# Altium PCB w32_dmx512-slaver_PCB.PcbDoc
Units mil, origin at the board's own origin, x right, y up, seen from the top; angles counter-clockwise.
Board outline 6010.03 x 1910.03 mil, 2 copper layers (Top Layer, Bottom Layer); 38 components, 36 nets, 155 pads, 18 vias.
Unrouted connection lines stored in the file: 7.
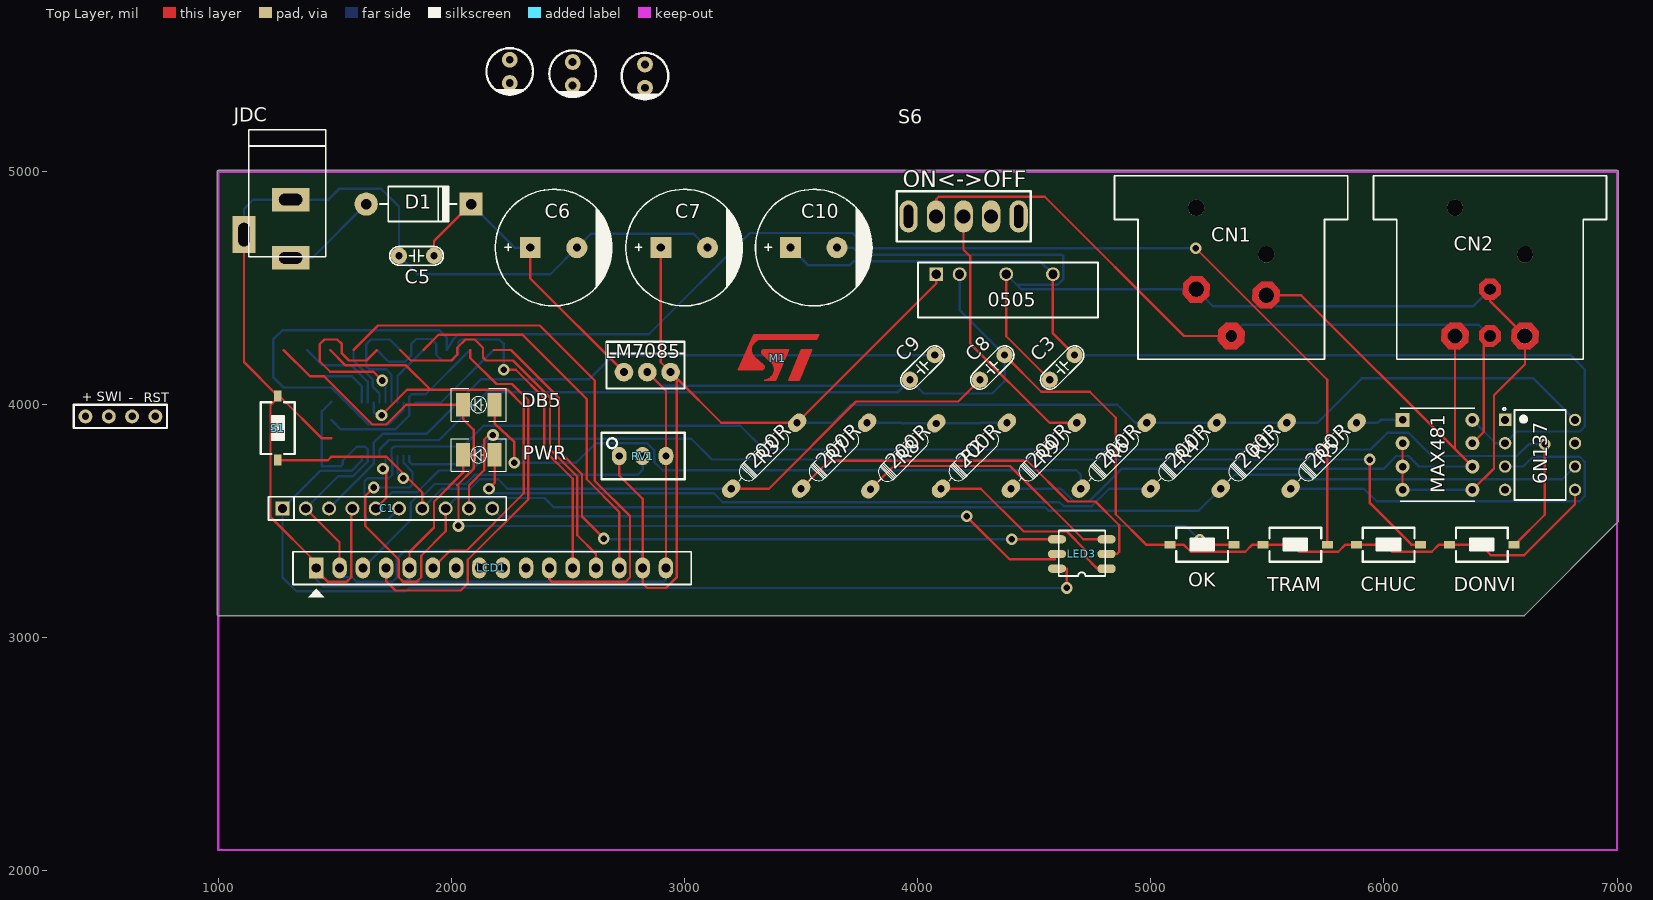
[diagram p0: Top Layer view]
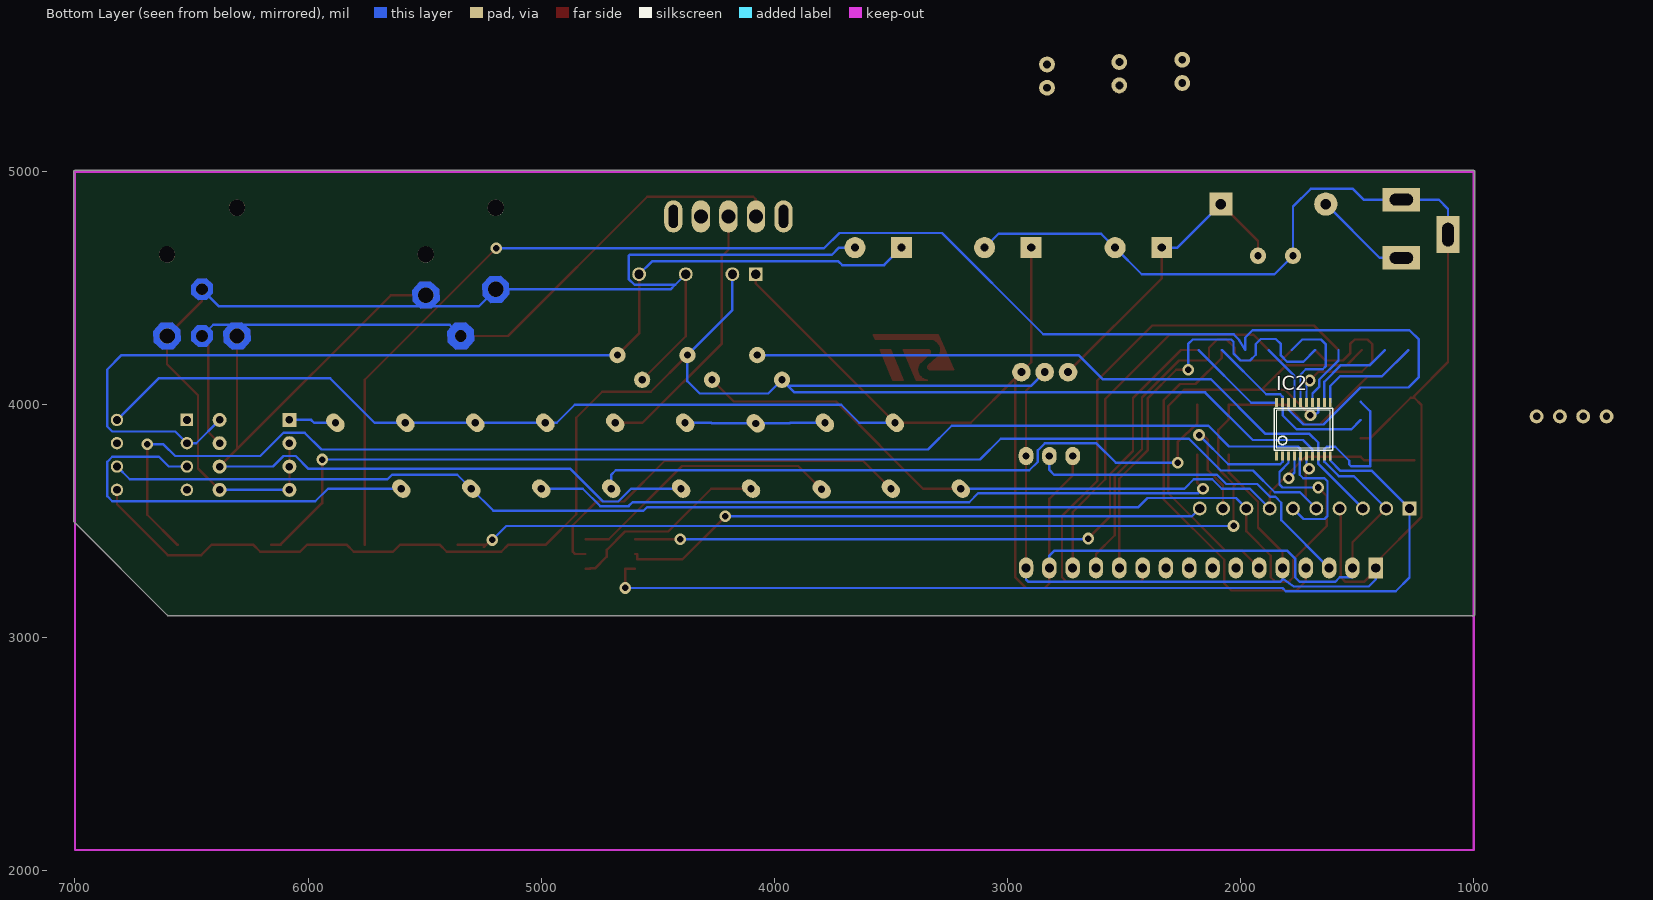
[diagram p1: Bottom Layer view, seen from below]

## Layer stack, top to bottom
Top Solder: solder mask 0.4, Solder Resist, Dk 3.5
Top Layer: signal copper 1.4
Dielectric 1: dielectric 12.6, FR-4, Dk 4.8
Bottom Layer: signal copper 1.4
Bottom Solder: solder mask 0.4, Solder Resist, Dk 3.5

## Board outline
1000,3094.99 cw(c1000,3100) 994.99,3100 994.99,5000 cw(c1000,5000) 1000,5005.02 7000,5005.02 cw(c7000,5000) 7005.02,5000 7005.02,3500 cw(c7000,3500) 7003.53,3496.44 7003.55,3496.45 6603.55,3096.45 6603.56,3096.47 cw(c6600,3100) 6600,3094.99

## Design rules (kind name [scope] priority, off if disabled: settings)
Clearance [All] p1: gap=10 ignorepadtopadclearanceinfootprint=FALSE except(0: Arc-Hole Track-Hole SMDPad-Hole THPad-Hole Via-Hole Fill-Hole Poly-Hole Region-Hole Text-Hole)
PolygonConnect [All] p1: connectstyle=Relief reliefconductorwidth=10 reliefentries=4 polygonreliefangle="90 Angle" airgapwidth=10
RoutingVias [All] p1: holewidth=28 width=50 viastyle="Through Hole" minholewidth=28 minwidth=50 maxholewidth=28 maxwidth=50
SolderMaskExpansion [All] p1: expansion=4
Width [All] p1: maxlimit=10 minlimit=10 preferedwidth=10
30 further rules are at their usual default settings.

## Classes and differential pairs
component class w32_dmx512-slaver_Schematic: 6N137 0505 C3 C5 C6 C7 C8 C9 C10 CHUC CN1 CN2 D1 DB5 DONVI IC2 JDC LED3 LM7085 M1 MAX481 OK PWR R1 R2 R3 R4 R5 R6 R7 R8 R9 RV1 S1 S6 TRAM

## Components (designator, comment, footprint, x,y, rotation, side; value= is the part's Value field where it differs from the comment)
6N137 "6N137" DIP762W50P254L977H451Q8 6670,3785 r0 top
0505 "REE-0505S" SIP600W25P254L1960H1020Q4P 4387.09,4491.89 r0 top
C1 "JP10" JP10-C1T 1275,3555 r0 top
C3 "104" CN150 4620,4160 r45 top
C5 "104" CN150 1850,4639 r0 top
C6 "Cap Pol3" CP2/5 2338,4674 r0 top
C7 "Cap Pol3" CP2/5 2898,4674 r0 top
C8 "104" CN150 4320,4160 r45 top
C9 "104" CN150 4020,4160 r45 top
C10 "Cap Pol3" CP2/5 3454,4674 r0 top
CHUC "SW-SMD" SW-SMD#1 6020,3400 r0 top
CN1 "NC3FBH1" NC3FBH1 5345,4495 r0 top
CN2 "NC3MBH" NC3MBH_NC3MBH(Primary) 6455,4495 r0 top
D1 "1N4007" D2A 2084,4861 r180 top
DB5 "LED" LED-RED-0805 2185,4000 r180 top (schematic designator LED2)
DONVI "SW-SMD" SW-SMD#1 6420,3400 r0 top
IC2 "STM8S003F3P6" TSSOP20 1730,3895 r180 bottom
JDC "Jac DC" DC-IN 1210,4755 r270 top
LCD1 "LCD 16x2A" LCD16X2N 1420,3300 r0 top
LED3 "150141M173100" "LED RGB 5050" 4700,3360 r180 top
LM7085 "LM7805" 7805 2840,4140 r0 top
M1 "STLOGO" STLOGO-SILVER 3400,4200 r0 top
MAX481 "MAX481CPA" 21-0043D_8 6380,3635 r0 top
OK "SW-SMD" SW-SMD#2 5220,3400 r180 top
PWR "LED" LED-RED-0805 2185,3785 r180 top (schematic designator LED1)
R1 "R0.4W" "DIEN TRO 1/4 W" 5300,3640 r45 top
R2 "R0.4W" "DIEN TRO 1/4 W" 4100,3640 r45 top
R3 "R0.4W" "DIEN TRO 1/4 W" 3200,3640 r45 top
R4 "R0.4W" "DIEN TRO 1/4 W" 5000,3640 r45 top
R5 "R0.4W" "DIEN TRO 1/4 W" 5600,3640 r45 top
R6 "R0.4W" "DIEN TRO 1/4 W" 4700,3640 r45 top
R7 "R0.4W" "DIEN TRO 1/4 W" 3500,3640 r45 top
R8 "R0.4W" "DIEN TRO 1/4 W" 3797.16,3637.16 r45 top
R9 "R0.4W" "DIEN TRO 1/4 W" 4400,3640 r45 top
RV1 "RV20K" RVAR10K 2820,3780 r0 top
S1 "SW-SMD" SW-SMD#1 1255,3900 r90 top
S6 "Switch" Switch 3960.67,4808 r0 top
TRAM "SW-SMD" SW-SMD#2 5620,3400 r180 top

## Footprints (in the part's own frame and the unit in brackets; to place one, negate y for a bottom-side part, rotate by r counter-clockwise, add the part's x,y. Pads: shape width x height; smd on the part's side, far side on the other; paste and mask are expansions set on the pad)
21-0043D_8 [mil]
  rect 60x60 hole 32: 1(-300,300)
  round 60 hole 32: 2(-300,200) 3(-300,100) 4(-300,0) 5(0,0) 6(0,100) 7(0,200) 8(0,300)
  silkscreen extent -310,-50 10,350
7805 [mil]
  round 80 hole 34: 1(-100,0) 2(0,0) 3(100,0)
  silkscreen extent -175,-70 160,130
CN150 [mil]
  round 70 hole 31: 1(-75,0) 2(75,0)
  silkscreen extent -115,-40 115,40, body extent -115,-33 115,33, height 235
CP2/5 [mil] "Tu hoa 1000uF/25V,50V"
  rect 90x90 hole 35: 1(0,0)
  round 90 hole 35: 2(200,0)
  silkscreen extent -150,-250 350,250, body extent -142,-246 350,246, height 984
D2A [mil] "Diode 2A, W 150mil, L 450mil"
  round 100 hole 45: 1(450,0)
  rect 100x100 hole 45: 2(0,0)
  silkscreen extent 61,-75 391,75, body extent 5,-47 435,54, height 100
DC-IN [mil] "Jac DC input"
  rect 100x160 hole 50 slot 100 at 90 deg: 1(125,100) 2(-125,100)
  rect 160x100 hole 50 slot 100 at 0 deg: 3(25,-100)
  silkscreen extent -425,-80 120,250, body extent -410,-105 134,269, height 434
"DIEN TRO 1/4 W" [mm]
  oval 2.2x1.6 hole 0.787: 1(0,0) 2(10.16,0)
  silkscreen extent 1.26,-1.02 8.88,1.02, body extent -0.3,-1.16 10.46,1.16, height 2.93
DIP762W50P254L977H451Q8 [mm]
  rect 1.35x1.35 hole 0.85: 1(-3.81,3.81)
  round 1.35 hole 0.85: 2(-3.81,1.27) 3(-3.81,-1.27) 4(-3.81,-3.81) 5(3.81,-3.81) 6(3.81,-1.27) 7(3.81,1.27) 8(3.81,3.81)
  silkscreen extent -4.04,-4.9 2.8,5.14
JP10-C1T [mm] "10 row, straight, gold plating"
  rect 1.52x1.52 hole 1.02: 1(0,0)
  round 1.52 hole 1.02: 2(2.54,0) 3(5.08,0) 4(7.62,0) 5(10.16,0) 6(12.7,0) 7(15.24,0) 8(17.78,0) 9(20.32,0) 10(22.86,0)
  silkscreen extent -1.52,-1.27 24.38,1.27, body extent -1.52,-1.25 24.38,1.25, height 8.51
LCD16X2N [mil] "LCD dipslay 16x2, 16 pin"
  rect 62x90 hole 39: 1(0,0)
  oval 62x90 hole 39: 2(100,0) 3(200,0) 4(300,0) 5(400,0) 6(500,0) 7(600,0) 8(700,0) 9(800,0) 10(900,0) 11(1000,0) 12(1100,0) 13(1200,0) 14(1300,0) 15(1400,0) 16(1500,0)
  silkscreen extent -100,-125 1608,70, body extent -320,-1353 2850,84, height 764
"LED RGB 5050" [mm]
  oct 2x0.9 smd: 1(-2.794,1.6)
  oval 2x0.9 smd: 2(-2.794,0) 3(-2.794,-1.6) 4(2.606,-1.6) 5(2.606,0) 6(2.606,1.6)
  silkscreen extent -2.67,-2.54 2.41,2.4, body extent -2.78,-2.54 2.52,2.46, height 1.6
LED-RED-0805 [mil]
  rect 60x100 smd: 1(0,0) 2(135,0)
  silkscreen extent -50,-70 185,70, body extent -20,-60 154,60, height 75
NC3FBH1 [mil]
  round 66 hole 66: 1(-150,0) 2(150,-25)
  round 50 hole 50: 3(0,-200)
  round 70 hole 70 unplated: None(-150,350) None(150,150)
  Top Layer region: -91.27,21.38 -123.59,56.64 -171.38,58.73 -206.64,26.41 -208.73,-21.38 -176.41,-56.64 -128.62,-58.73 -93.36,-26.41
  Top Layer region: 58.73,-178.62 26.41,-143.36 -21.38,-141.27 -56.64,-173.59 -58.73,-221.38 -26.41,-256.64 21.38,-258.73 56.64,-226.41
  Top Layer region: 208.73,-3.62 176.41,31.64 128.62,33.73 93.36,1.41 91.27,-46.38 123.59,-81.64 171.38,-83.73 206.64,-51.41
  Bottom Layer region: -91.27,21.38 -123.59,56.64 -171.38,58.73 -206.64,26.41 -208.73,-21.38 -176.41,-56.64 -128.62,-58.73 -93.36,-26.41
  Bottom Layer region: 58.73,-178.62 26.41,-143.36 -21.38,-141.27 -56.64,-173.59 -58.73,-221.38 -26.41,-256.64 21.38,-258.73 56.64,-226.41
  Bottom Layer region: 208.73,-3.62 176.41,31.64 128.62,33.73 93.36,1.41 91.27,-46.38 123.59,-81.64 171.38,-83.73 206.64,-51.41
  Multi-Layer region: -91.27,21.38 -123.59,56.64 -171.38,58.73 -206.64,26.41 -208.73,-21.38 -176.41,-56.64 -128.62,-58.73 -93.36,-26.41
  Multi-Layer region: 58.73,-178.62 26.41,-143.36 -21.38,-141.27 -56.64,-173.59 -58.73,-221.38 -26.41,-256.64 21.38,-258.73 56.64,-226.41
  Multi-Layer region: 208.73,-3.62 176.41,31.64 128.62,33.73 93.36,1.41 91.27,-46.38 123.59,-81.64 171.38,-83.73 206.64,-51.41
  silkscreen extent -500,-300 500,488
NC3MBH_NC3MBH(Primary) [mil]
  round 66 hole 66: 1(150,-200) 2(-150,-200)
  round 50 hole 50: 3(0,-200) G(0,0)
  round 70 hole 70 unplated: None(-150,350) None(150,150)
  Top Layer region: 208.73,-178.62 176.41,-143.36 128.62,-141.27 93.36,-173.59 91.27,-221.38 123.59,-256.64 171.38,-258.73 206.64,-226.41
  Top Layer region: 46.98,-182.9 21.13,-154.68 -17.1,-153.02 -45.32,-178.87 -46.98,-217.1 -21.13,-245.32 17.1,-246.98 45.32,-221.13
  Top Layer region: -91.27,-178.62 -123.59,-143.36 -171.38,-141.27 -206.64,-173.59 -208.73,-221.38 -176.41,-256.64 -128.62,-258.73 -93.36,-226.41
  Top Layer region: 46.98,17.1 21.13,45.32 -17.1,46.98 -45.32,21.13 -46.98,-17.1 -21.13,-45.32 17.1,-46.98 45.32,-21.13
  Bottom Layer region: 208.73,-178.62 176.41,-143.36 128.62,-141.27 93.36,-173.59 91.27,-221.38 123.59,-256.64 171.38,-258.73 206.64,-226.41
  Bottom Layer region: 46.98,-182.9 21.13,-154.68 -17.1,-153.02 -45.32,-178.87 -46.98,-217.1 -21.13,-245.32 17.1,-246.98 45.32,-221.13
  Bottom Layer region: -91.27,-178.62 -123.59,-143.36 -171.38,-141.27 -206.64,-173.59 -208.73,-221.38 -176.41,-256.64 -128.62,-258.73 -93.36,-226.41
  Bottom Layer region: 46.98,17.1 21.13,45.32 -17.1,46.98 -45.32,21.13 -46.98,-17.1 -21.13,-45.32 17.1,-46.98 45.32,-21.13
  Multi-Layer region: 208.73,-178.62 176.41,-143.36 128.62,-141.27 93.36,-173.59 91.27,-221.38 123.59,-256.64 171.38,-258.73 206.64,-226.41
  Multi-Layer region: 46.98,-182.9 21.13,-154.68 -17.1,-153.02 -45.32,-178.87 -46.98,-217.1 -21.13,-245.32 17.1,-246.98 45.32,-221.13
  Multi-Layer region: -91.27,-178.62 -123.59,-143.36 -171.38,-141.27 -206.64,-173.59 -208.73,-221.38 -176.41,-256.64 -128.62,-258.73 -93.36,-226.41
  Multi-Layer region: 46.98,17.1 21.13,45.32 -17.1,46.98 -45.32,21.13 -46.98,-17.1 -21.13,-45.32 17.1,-46.98 45.32,-21.13
  silkscreen extent -500,-300 500,488
RVAR10K [mm] "Bien tro vi chinh"
  oval 1.6x2 hole 0.8: 1(-2.54,0) 2(0,0) 3(2.54,0)
  silkscreen extent -4.47,-2.54 4.6,2.54, body extent -4.54,-2.4 4.66,2.4, height 12.02
SIP600W25P254L1960H1020Q4P [mm]
  rect 1.508x1.508 hole 1: 1(-7.8,1.73)
  round 1.508 hole 1: 2(-5.26,1.73) 4(-0.18,1.73) 6(4.9,1.73)
  silkscreen extent -9.8,-3 9.8,3
STLOGO-SILVER [mil]
  Top Layer lines w6: -149,-49 -169,-49 ; -34,-89 -9,-89 -9,-84 -29,-84 -24,-79 -4,-79 -4,-74 -19,-74 -14,-69 1,-69 1,-64 -14,-64 -9,-59 6,-59 6,-54 -9,-54 -9,-49 6,-49 ; 51,-94 106,36 86,-94 141,36 81,-94 ; 166,86 -109,86 -104,91 171,91 171,96 -104,96 -164,-49 -104,86 -159,-49 -99,86 -104,71 -94,86 -74,81 -94,81 -94,76 -99,71 -114,56 -119,31 -154,-49 -64,-44 -149,-44 ; -169,-49 -104,101 176,101 166,81 -69,81 ccw(c-69,36) -100.82,4.18 -62.31,-31.57 cw(c-69,-39) -69,-49 -169,-49 ; -149,-44 -119,26 -114,26 -119,21 -114,21 -124,16 -114,16 -124,11 -109,11 -129,6 -104,6 -129,1 -99,1 -134,-4 -94,-4 -134,-9 -89,-9 -139,-14 -84,-14 -139,-19 -79,-19 -139,-24 -74,-24 -144,-29 -69,-29 -144,-34 -64,-34 -144,-39 -64,-39 -149,-44 ; -59,16 -9,-29 -14,-39 -9,-64 16,-29 ; -59,16 -19,-19 ; -59,16 -64,21 36,21 41,26 -69,26 -64,31 41,31 -54,16 -19,-19 ; -59,16 36,16 31,11 -49,11 -49,6 31,6 31,1 -39,1 -39,-4 26,-4 26,-9 -29,-9 -29,-14 21,-14 21,-19 -19,-19 ; -19,-19 -19,-24 16,-24 16,-29 ; 6,-49 16,-29 ; 6,-49 6,-44 -9,-44 -9,-39 11,-39 11,-34 -14,-34 -14,-29 16,-29 ; 81,-94 131,36 76,-94 126,36 71,-94 121,36 66,-94 116,36 61,-94 111,36 56,-94 101,36 ; 81,-94 136,36 91,-94 ; 91,-94 146,36 101,36 ; 91,-94 46,-94 101,36 ; -65.69,18.57 cw(c-59,26) -59,36 46,36 -9,-94 -59,-94 ccw(c-59,-49) -27.18,-17.18 -65.69,18.57
SW-SMD#1 [mm] "Switch SMD type"
  rect 1.2x0.8 smd: 1(-3.5,0) 2(3.5,0)
  silkscreen extent -2.82,-1.85 2.82,1.85, body extent -3.05,-1.85 3.05,1.85, height 2.5
SW-SMD#2 [mm] "Switch SMD type"
  rect 1.2x0.8 smd: 1(3.5,0) 2(-3.5,0)
  silkscreen extent -2.82,-1.85 2.82,1.85, body extent -3.05,-1.85 3.05,1.85, height 2.5
Switch [mm]
  oval 2x3.5 hole 1.5: 1(3,0) 2(6,0) 3(9,0)
  oval 2x3.5 hole 1 slot 2.5 at 90 deg: 4(0,0) 5(12,0)
  silkscreen extent -1.27,-2.73 13.34,2.73, body extent -0.5,-2.85 12.5,9.35, height 2.6
TSSOP20 [mil]
  rect 12x39 smd: 1(-115.16,-114.87) 2(-89.57,-114.87) 3(-63.98,-114.87) 4(-38.39,-114.87) 5(-12.8,-114.87) 6(12.8,-114.87) 7(38.39,-114.87) 8(63.98,-114.87) 9(89.57,-114.87) 10(115.16,-114.87) 11(115.16,114.87) 12(89.57,114.87) 13(63.98,114.87) 14(38.39,114.87) 15(12.8,114.87) 16(-12.8,114.87) 17(-38.39,114.87) 18(-63.98,114.87) 19(-89.57,114.87) 20(-115.16,114.87)
  silkscreen extent -125,-90 125,90

## Part data
6N137: "High CMR, High Speed TTL Compatible Optocouplers"
0505: "REE Series 4.5 - 5.5 V 1 W Single Output Through Hole DC/DC-Converter - SIP7"
C1: "WR-PHD 2.54 mm Angled Socket Header"
C3 C5 C8 C9: library part CN1.5, "Capacitor Ceramic"
C6 C7 C10: "Polarized Capacitor (Surface Mount)"
CHUC DONVI OK S1 TRAM: "Switch"
CN1: "XLR Receptacle; Female; Gold; Horizontal PCB Mount; 0.996 in.; Ground"
CN2: "Conn XLR Connector Adapter M 3 POS Solder RA Thru-Hole 3 Terminal 1 Port"
D1: library part D1A, "Diode 1A"
DB5 PWR: library part "LED SMD"
IC2: "Mainstream Value line 8-bit MCU with 8 Kbytes Flash, 16 MHz CPU, integrated EEPROM"
JDC: library part DCIN, "Jac DC input"
LCD1: library part LCD16x2A, "LCD dipslay 16 char, 2 line"
LED3: library part "LED RGB 5050"
MAX481: "Single Transmitter/Receiver RS-422/RS-485 8-Pin PDIP N"
R1 R2 R3 R4 R5 R6 R7 R8 R9: library part "Res 1/4 W", "Resistor"
RV1: library part "Variable Resistor", "Variable Resistor"

## Free pads (board coordinates)
  round 68 hole 34: 2(2250,5380) 2(2250,5480) 2(2520,5370) 2(2520,5470) 2(2830,5360) 2(2830,5460)
  round 60 hole 32: 3(430,3950) 3(530,3950) 3(630,3950) 3(730,3950)

## Via types
v1: diameter 50, hole 28, Top Layer to Bottom Layer, 18 vias

## Nets (pads, with @x,y where several pads share a name; then routed paths per layer and width w, separated by ;. In a path a pad name is that pad's centre, name@x,y a point inside that pad or via, vN(x,y) a via of type N, cw(c..) or ccw(c..) an arc to the next point about the centre after c; other vN are vias at no path point)
+5V: 6N137.8 0505.1 C1.2 C7.1 IC2.9 LCD1.2 LCD1.15 LM7085.3 R1.2 R3.2 R4.2 R6.2 RV1.1 | length 10004.1
  Top Layer w10: C1.2 1520,3410 LCD1.2 ; RV1.1 2720,3697 2820,3597 LCD1.15 2820,3234 2840,3214 2920,3214 2967,3261 LM7085.3@2967,4113 ; C7.1 2898,4182 LM7085.3 LM7085.3@2967,4113 ; 0505.1 4080,4520 R3.2 3157.16,3922.84 LM7085.3@2967,4113
  Bottom Layer w10: C1.2 1513.48,3693.48 1578.22,3693.48 1640.43,3755.7 IC2.9 1640.43,3810 1630.43,3820 1594,3820 1534,3760 1534,3744.3 1526,3736.3 1444,3736.3 1444,3972.11 1485,4013.11 ; LCD1.2 1520,3260 1574,3260 1594,3240 1746,3240 1766,3260 1766,3340 1799,3373 2800,3373 2820,3353 LCD1.15 ; R3.2 3636,3922.84 3713.16,4000 4856,4000 4933.16,3922.84 R6.2 R4.2 R1.2 5715,3922.84 5905.16,4113 6642,4113 6N137.8
BLUE: C1.1 IC2.10 LED3.6 | length 4261.4
  Top Layer w10: LED3.6 4640,3297.01 v1(4640,3214)
  Bottom Layer w10: IC2.10 1614.84,3760.52 1570.62,3716.3 1436.3,3716.3 C1.1 1275,3259 1334,3200 1806,3200 1820,3214 v1(4640,3214)
CHUC: C1.5 CHUC.2 IC2.6 | length 5158.8
  Top Layer w10: C1.5 1720,3600 1720,3712 v1(1706,3726) ; v1(5940,3765) 5940,3578 6118,3400 CHUC.2
  Bottom Layer w10: C1.5 1745,3625 1853,3625 1946,3718 2085,3718 2221.37,3854.37 3028.63,3854.37 3118,3765 v1(5940,3765) ; v1(1706,3726) 1717.2,3737.2 IC2.6
DONVI: C1.6 DONVI.2 IC2.5 | length 6173
  Top Layer w10: DONVI.2 6562,3400 6690,3528 v1(6690,3830)
  Bottom Layer w10: C1.6 1730,3510 1640,3510 1627,3523 1627,3672 1640,3685 1731.02,3685 1746.02,3700 1746.02,3771.72 1742.8,3774.95 IC2.5 1742.8,3810 1753.8,3821 2049,3821 2138,3910 3239,3910 3341,3808 5943,3808 6015,3880 6105,3880 6205,3780 6570,3780 6620,3830 v1(6690,3830)
GISOL: 0505.4 C3.1 C10.2 CN1.1 CN2.1 CN2.G MAX481.2 MAX481.3 MAX481.4 MAX481.5 | length 5503.1
  Top Layer w10: 0505.4 4380,4293.94 C3.1 ; MAX481.4 MAX481.3 MAX481.2 ; MAX481.5 6472,3727 6472,4041 6605,4174 CN2.1 6455,4445 CN2.G
  Bottom Layer w10: C10.2 3723,4674 3754,4643 4621,4643 4625,4639 4625,4540 4600,4515 4425,4515 ; 0505.4 4425,4515 ; MAX481.4 MAX481.5 ; CN2.G 6382,4422 5268,4422 CN1.1 4445,4495 4425,4515
GND: 6N137.5 0505.2 C1.4 C5.1 C6.2 C7.2 C8.2 C9.1 CHUC.1 DONVI.1 IC2.7 JDC.2 JDC.3 LCD1.1 LCD1.5 LCD1.16 LM7085.2 OK.1 PWR.2 RV1.3 S1.2 TRAM.1 | length 15831.5
  Top Layer w10: JDC.3 1110,4182.8 S1.2 S1.2@1255,4030 ; 1485,3855.63 1444.37,3855.63 1270,4030 S1.2@1255,4030 ; C1.4 1570,3550 1570,3260 1550,3240 1470,3240 1420,3290 LCD1.1 1420,3322 1224,3518 1224,3999 S1.2@1255,4030 ; LCD1.5 1820,3367.92 1925,3472.92 1925,3584 2050,3709 PWR.2 ; LM7085.2 2920,4060 RV1.3 LCD1.16 ; C8.2 4530.07,4056 4738,4056 4850,3944 4850,3530 4980,3400 OK.1 5140,3400 5171,3369 5405,3369 5436,3400 TRAM.1 5605,3400 5636,3369 5804,3369 5835,3400 CHUC.1 6004,3400 6035,3369 6205,3369 6236,3400 DONVI.1 6413,3400 6458,3355 6602,3355 6820,3573 6N137.5
  Bottom Layer w10: JDC.3 1110,4840 1150,4880 JDC.2 1472,4880 1518,4926 1699,4926 1775,4850 C5.1 1854,4560 2424,4560 C6.2 2598,4734 3038,4734 C7.2 ; LCD1.1 1420,3250 1450,3220 1772,3220 1820,3254 ; IC2.7 1691.61,3808.61 1732,3849 1948,3849 2152,4053 3913,4053 3941,4081 ; LCD1.5 1820,3254 ; LM7085.2 2899,4081 3941,4081 ; LCD1.16 2920,3250 2910,3240 1830,3240 1820,3250 1820,3254 ; 0505.2 4180,4406.07 C8.2 4373.03,4101.03 4320,4048 4025.94,4048 C9.1 3941,4081
GREEN: IC2.20 LED3.4 | length 3423.2
  Top Layer w10: 2180,4235 2255,4235 2461,4029 2461,3801 2560,3702 2560,3520 v1(2654,3426) ; v1(4404,3423) 4541.98,3423 LED3.4
  Bottom Layer w10: IC2.20 1845.16,4009 1954,4009 2180,4235 ; v1(2654,3426) 2657,3423 v1(4404,3423)
LCD_DB4: IC2.14 LCD1.11 | length 2762.6
  Top Layer w10: 1580,4235 1685,4340 2379,4340 2615,4104 2615,3673.29 2766,3522.29 2766,3260 2746,3240 2430,3240 2420,3250 LCD1.11
  Bottom Layer w10: 1580,4235 1580,4190 1663,4107 1663,4076.61 1691.61,4048 IC2.14
LCD_DB5: IC2.15 LCD1.12 | length 2694.7
  Top Layer w10: 1680,4235 1635,4190 1560,4190 1530,4220 1530,4260 1510,4280 1455,4280 1435,4260 1435,4187 1480,4142 1665,4142 v1(1703,4104) ; v1(2225,4150) 2275.71,4150 2398.72,4026.99 2398.72,3804.28 2520,3683 LCD1.12
  Bottom Layer w10: 1680,4235 1731,4184 1800,4184 1827,4211 1827,4260 1849,4282 1913.08,4282 1935.08,4260 1935.08,4214.92 1960,4190 2000,4190 2030,4220 2030,4270 2040,4280 2205,4280 2225,4260 v1(2225,4150) ; v1(1703,4104) 1717.2,4089.8 IC2.15
LCD_DB6: IC2.16 LCD1.13 | length 2166.4
  Top Layer w10: 1780,4235 1825,4190 2000,4190 2025,4215 2025,4244.92 2060,4279.92 2100,4279.92 2135,4244.92 2135,4203 2148,4190 2264,4190 2423,4031 2423,3809 2540,3692 2540,3440 2620,3360 LCD1.13
  Bottom Layer w10: IC2.16 1742.8,4024 1743,4024 1743,4129 1720,4152 1647,4152 1635,4164 1635,4260 1655,4280 1735,4280 1780,4235
LCD_DB7: IC2.17 LCD1.14 | length 1895.1
  Top Layer w10: 1880,4235 1944.92,4299.92 2305.08,4299.92 2580,4025 2580,3680 2720,3540 LCD1.14
  Bottom Layer w10: IC2.17 1768.39,4123.39 1880,4235
LCD_EN: IC2.13 LCD1.6 | length 2162.2
  Top Layer w10: 1480,4235 1546,4169 1805,4169 1909,4065 ; v1(1700,3955) 1810,4065 1909,4065 ; LCD1.6 1993,3373 2063,3373 2310,3620 2310,3995 2240,4065 1909,4065
  Bottom Layer w10: IC2.13 1666.02,3968.98 1680,3955 v1(1700,3955)
LCD_RS: IC2.19 LCD1.4 | length 2487.6
  Top Layer w10: LCD1.4 1720,3243 1760,3203 2040,3203 2070,3233 2070,3335 2330,3595 2330,4019 2259.91,4089.09 2192.65,4089.09 2080,4201.74 2080,4235
  Bottom Layer w10: 1485,3934.37 1524.37,3895 1760,3895 1819.57,3954.57 IC2.19 1819.57,4034.57 1830,4045 1890,4045 2080,4235
Net6N137_3: 6N137.3 R5.1 | length 1809
  Bottom Layer w10: R5.1 5915,3640 5969,3586 6840,3586 6862,3608 6862,3755 6840,3777 6640,3777 6598,3735 6N137.3
NetC5_2: C5.2 C6.1 D1.2 LM7085.1 | length 1319.8
  Top Layer w10: C5.2 1925,4702 D1.2 ; C6.1 2338,4542 LM7085.1
  Bottom Layer w10: D1.2 2271,4674 C6.1
NetCN1_2: CN1.2 CN2.2 MAX481.6 R9.1 | length 3776.5
  Top Layer w10: CN1.2 5645,4470 6305,3810 ; CN2.2 6305,3810 ; MAX481.6 6305,3810
  Bottom Layer w10: R9.1 4615,3640 4669.85,3585.15 4735,3585.15 4874.85,3725 5998,3725 6053,3780 6105,3780 6150,3735 MAX481.6
NetCN1_3: CN1.3 CN2.3 MAX481.7 S6.1 | length 3231.8
  Top Layer w10: S6.1 4078.78,4880.78 4090,4892 4545,4892 5142,4295 CN1.3 ; MAX481.7 6429,3884 6429,4269 CN2.3
  Bottom Layer w10: CN1.3 5393,4343 6407,4343 CN2.3
NetD1_1: D1.1 JDC.1 | length 419.7
  Bottom Layer w10: JDC.1 1403,4630 D1.1
NetLCD1_3: LCD1.3 RV1.2 | length 1477.9
  Bottom Layer w10: LCD1.3 1825,3505 1825,3580 1850,3605 1873,3605 1928,3660 2061,3660 2101,3700 2800,3700 2820,3720 RV1.2
NetLED1_1: PWR.1 R4.1 | length 3055.9
  Top Layer w10: v1(2161,3640) 2185,3664 PWR.1
  Bottom Layer w10: v1(2161,3640) 2181,3620 3126,3620 3164,3582 4608.3,3582 4625.15,3565.15 4746.65,3565.15 4821.5,3640 R4.1
NetLED2_1: DB5.1 R6.1 | length 2894.3
  Top Layer w10: DB5.1 2185,3920 2270,3840 v1(2270,3751)
  Bottom Layer w10: v1(2270,3751) 2534.63,3751 2618,3834.37 2840,3834.37 2870,3804.37 2870,3755 2906,3719 4680,3719 4700,3699 R6.1
NetLED3_1: LED3.1 R2.1 | length 869.1
  Top Layer w10: R2.1 4271,3640 4455,3456 4640,3456 4718.5,3377.5 4718.5,3348.5 4769.01,3298 4789,3298 4789.99,3297.01 LED3.1
NetLED3_2: LED3.2 R7.1 | length 1701.6
  Top Layer w10: R7.1 3620,3760 4470,3760 4645,3585 4763,3585 4865,3483 4865,3370 4855,3360 LED3.2
NetLED3_3: LED3.3 R8.1 | length 1184.4
  Top Layer w10: R8.1 3897.16,3737.16 4395.84,3737.16 4710.01,3422.99 LED3.3
NetMAX481_1: MAX481.1 R5.2 | length 202.2
  Bottom Layer w10: R5.2 5975,3922.84 5987.16,3935 MAX481.1
NetR2_2: R2.2 R7.2 R8.2 | length 602.4
  Bottom Layer w10: R7.2 3932,3922.84 3934.84,3920 R8.2 4267.19,3920 4270.03,3922.84 R2.2
NetR9_2: R9.2 S6.2 | length 1155.4
  Top Layer w10: S6.2 4196.89,4665 4225,4636.89 4225,4263 4565.16,3922.84 R9.2
NRST: C1.7 C8.1 IC2.4 R3.1 S1.1 | length 3531.1
  Top Layer w10: S1.1 1470.31,3762.2 1485,3776.89 1721.13,3776.89 v1@1803.01,3695.01 ; v1(1793,3685) v1@1803.01,3695.01 ; C1.7 1875,3623.02 v1@1803.01,3695.01 ; R3.1 3362,3640 3736,4014 4174,4014 C8.1
  Bottom Layer w10: IC2.4 1768.39,3709.61 v1(1793,3685) ; C1.7 1960,3640 2081,3640 2121,3680 2201,3680 2241,3640 R3.1
OK: DB5.2 IC2.11 OK.2 | length 5351.7
  Top Layer w10: 1280,4235 1393,4122 1453,4122 1660,3915 1720.43,3915 1805.43,4000 DB5.2 2050,3938 2095,3893 2095,3725 2025,3655 2030,3650 v1(2030,3480) ; v1(5210,3420) 5216,3420 5236,3400 ; 5246,3390 5236,3400 ; OK.2 5236,3400
  Bottom Layer w10: 1280,4235 1393,4122 1572.84,4122 1614.84,4080 IC2.11 ; v1(2030,3480) 5150,3480 v1(5210,3420)
PB4: IC2.12 | length 405.8
  Bottom Layer w10: 1380,4235 1445,4170 1569.28,4170 1640.43,4098.85 IC2.12
PD1: IC2.18 TRAM.2 | length 6650.4
  Top Layer w10: v1(5193,4671) 5757,4107 5757,3400 TRAM.2
  Bottom Layer w10: IC2.18 1793.98,3979 1729.98,3915 1644,3915 1485,4074 1280,4074 1235,4119 1235,4280 1275,4320 1948.86,4320 1980,4288.86 1980,4235 2007.74,4280 2029.8,4302.06 2846.06,4302.06 3281,4737 3721,4737 3787,4671 v1(5193,4671)
PD4: C1.10 LED3.5 | length 2535.3
  Top Layer w10: v1(4210,3521) 4393.73,3337.27 4588.03,3337.27 4588.03,3360 LED3.5
  Bottom Layer w10: C1.10 2209,3521 v1(4210,3521)
PD5: C1.9 IC2.2 | length 807.4
  Top Layer w10: C1.9 2075,3654 2140,3719 2140,3850 2160,3870 v1(2178,3870)
  Bottom Layer w10: IC2.2 1819.57,3755.43 1830,3745 2053,3745 v1(2178,3870)
PD6: 6N137.6 C1.8 IC2.3 R1.1 | length 6202.3
  Top Layer w10: v1(1667,3645) 1630,3608 1630,3480 1774,3336 1774,3260 1794,3240 1850,3240 1870,3260 1870,3352 1975,3457 C1.8
  Bottom Layer w10: v1(1667,3645) 1820,3645 1833,3658 1833,3712 1793.98,3751.02 IC2.3 ; C1.8 2020,3600 2399,3600 2438,3561 4545.14,3561 4560.99,3545.15 5205.15,3545.15 R1.1 5360,3700 5640,3700 5660,3680 6765,3680 6N137.6
VCAP: C1.3 C9.2 IC2.8 | length 2923.9
  Bottom Layer w10: C1.3 1666.02,3746.02 IC2.8 1666.02,3837.02 1704,3875 1893,3875 2128,4110 2592,4110 2695.03,4213.03 C9.2
VISOL: 6N137.2 0505.6 C3.2 C10.1 MAX481.8 | length 4583.9
  Top Layer w10: 0505.6 4580,4306.07 C3.2
  Bottom Layer w10: C10.1 3529,4599 3709,4599 3725,4615 4525,4615 0505.6 ; C3.2 6799.97,4213.03 6862,4151 6862,3907 6840,3885 6570,3885 6N137.2 6480,3835 MAX481.8
pads on no net: 6N137.1 6N137.4 6N137.7 CN1.None CN2.None IC2.1 LCD1.7 LCD1.8 LCD1.9 LCD1.10 S6.3 S6.4 S6.5

## Keep-outs
Keep-Out Layer:
  lines w10: 1000,2090 7000,2090 7000,5000 1000,5000 1000,2090

## Silkscreen, mask and mechanical layers (free items; w line width, h text height)
Top Overlay:
  circle w10: c2830,5410 r100
  circle w10: c2520,5420 r100
  circle w10: c2250,5430 r100
  lines w10: 2190,5350 2307,5350 ; 2207,5340 2293,5340 ; 2460,5340 2577,5340 ; 2477,5330 2563,5330 ; 2770,5330 2887,5330 ; 2787,5320 2873,5320 ; 380,3900 780,3900 780,4000 380,4000 380,3900
  text "+" at 415,4015 h40
  text "SWI" at 478.23,4014.54 h40
  text "-" at 615,4010 h40
  text "RST" at 680,4010 h40

## Text inside footprints (layer, text, board x,y; h text height)
CN1: Mechanical 1 "1" at 5094.87,4510.17 h73.82; Mechanical 1 "3" at 5244.79,4309.79 h73.82; Mechanical 1 "2" at 5395.14,4485.16 h73.82
CN2: Mechanical 1 "1" at 6605.36,4359.86 h73.82; Mechanical 1 "3" at 6455,4360.07 h73.82; Mechanical 1 "2" at 6304.75,4359.95 h73.82; Mechanical 1 "G" at 6455,4560.3 h73.82
R1: Top Overlay "200R" at 5416.67,3707.18 h110.24 r45
R2: Top Overlay "200R" at 4216.67,3707.18 h110.24 r45
R3: Top Overlay "200R" at 3316.67,3707.18 h110.24 r45
R4: Top Overlay "200R" at 5116.67,3707.18 h110.24 r45
R5: Top Overlay "200R" at 5716.67,3707.18 h110.24 r45
R6: Top Overlay "200R" at 4816.67,3707.18 h110.24 r45
R7: Top Overlay "200R" at 3616.67,3707.18 h110.24 r45
R8: Top Overlay "200R" at 3913.83,3704.33 h110.24 r45
R9: Top Overlay "200R" at 4516.67,3707.18 h110.24 r45
S6: Top Overlay "ON<->OFF" at 3935.67,4933 h70.87